# EAGLE board RC_Transmitter_TX_FINAL_v4.4 (EAGLE 9.7.0)
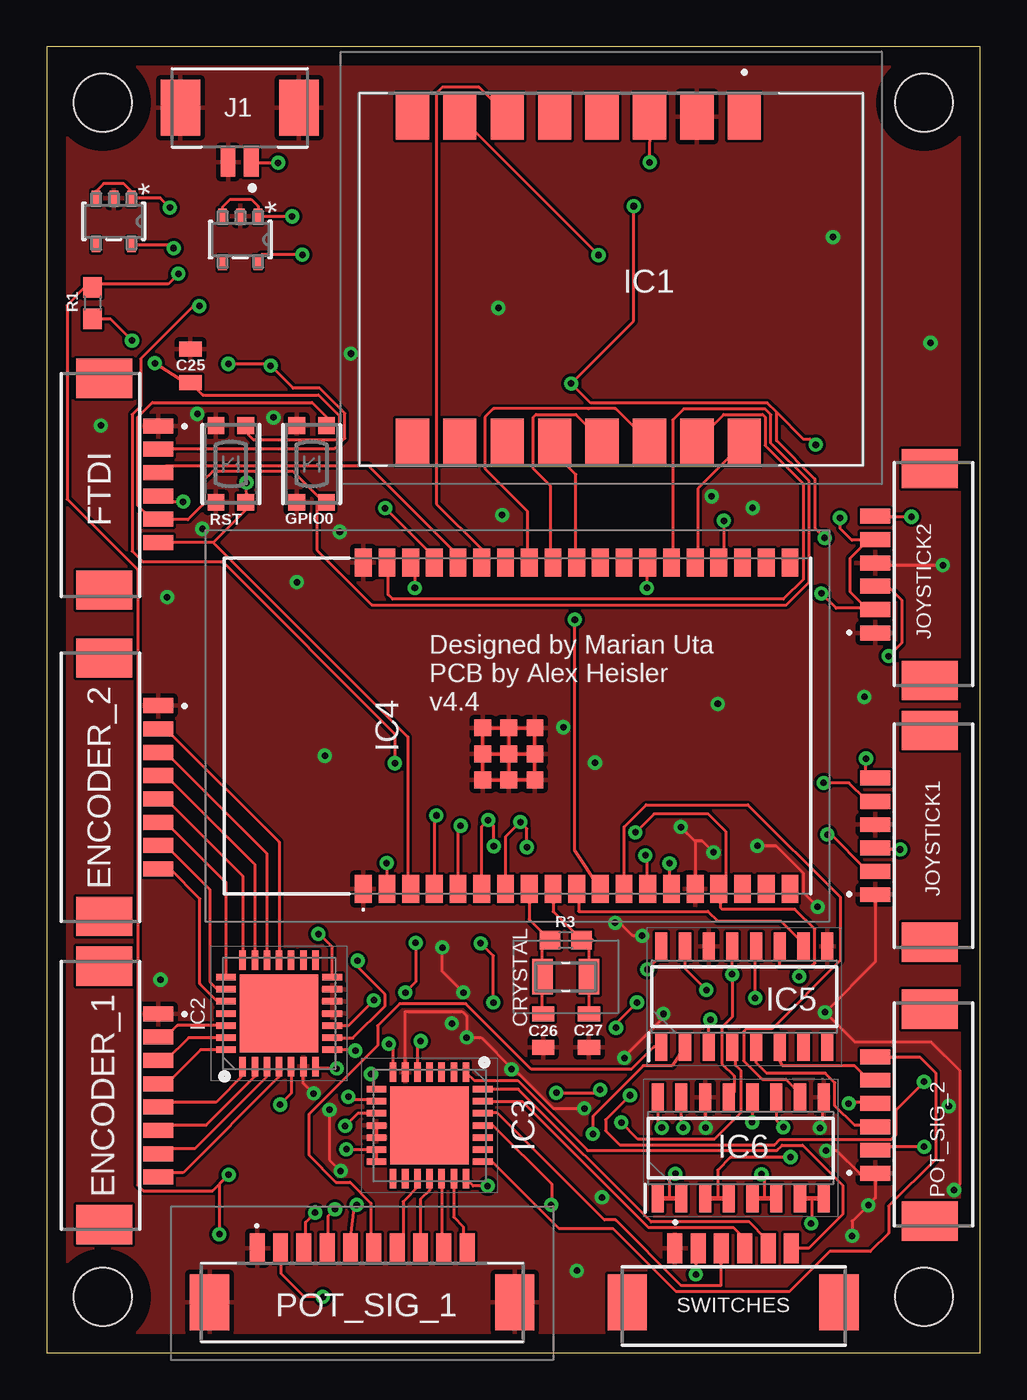
[diagram p0: board, top side]
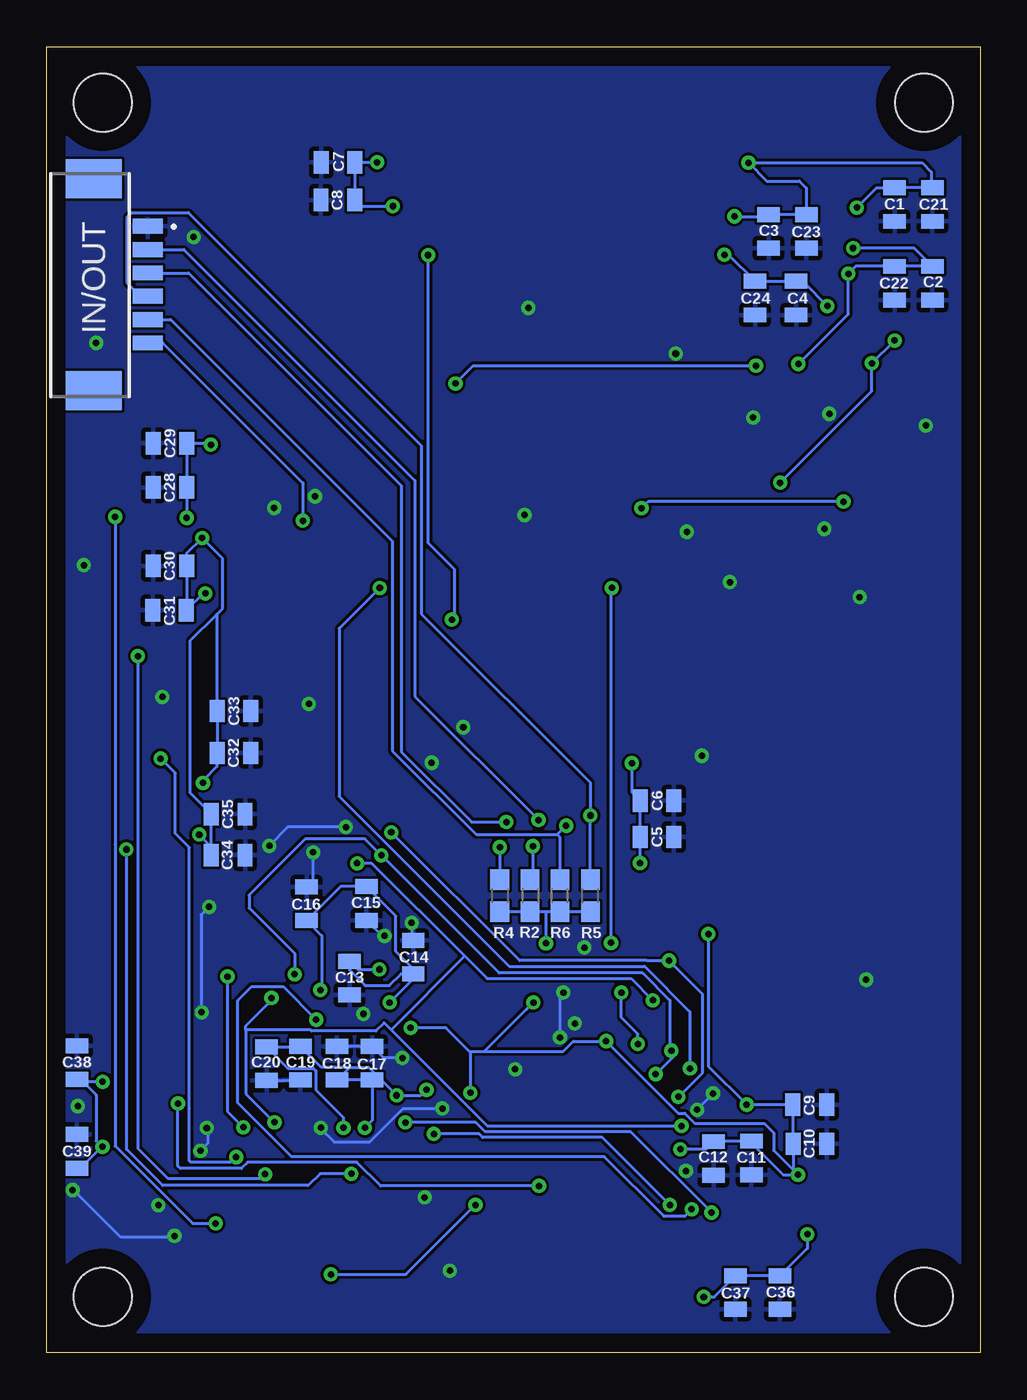
[diagram p1: board, bottom side, seen from below]

Size 50 x 70 mm. Coordinates in mm from the lower left corner, seen from the top.
Outline: 0,0 50,0 50,70 0,70 0,0
Copper layers (1*16): Top 0.035mm / dielectric 1.5mm / Bottom 0.035mm
Design rules "default": minimum track width 6mil, minimum drill 0.35mm, track to track 6mil, track to pad 6mil, pad to pad 6mil, via to via 6mil, smd to smd 6mil, copper to edge 40mil, drill to drill 6mil, minimum pad ring 10mil, minimum via ring 8mil, stop-mask expansion 4mil, vias tented up to drill 0mil, thermal gap 10mil
Holes 3.1 mm at 3,3 47,3 47,67 3,67

## Footprints (pad centres in the part's own frame; a part is rotated, then mirrored left to right if it is on the bottom)
0805 = smd 0.8 x 1.2: 1 -0.9,0; 2 0.9,0
ECX327CDX1293 = smd 1.1 x 1.9: 1 -1.25,0; 2 1.25,0
53261-0871 = smd 0.8 x 1.6: 1 -4.375,1.004; 2 -3.125,1.004; 3 -1.875,1.004; 4 -0.625,1.004; 5 0.625,1.004; 6 1.875,1.004; 7 3.125,1.004; 8 4.375,1.004 | smd 2.1 x 3: 9 6.925,-1.896; 10 -6.925,-1.896
0532610671 = smd 0.8 x 1.6: 1 -3.125,1.004; 2 -1.875,1.004; 3 -0.625,1.004; 4 0.625,1.004; 5 1.875,1.004; 6 3.125,1.004 | smd 2.1 x 3: 7 -5.675,-1.896; 8 5.675,-1.896
BTN_KMR2_4.6X2.8 = smd 0.9 x 0.9: A 2.05,0.8; A' -2.05,0.8; B 2.05,-0.8; B' -2.05,-0.8
LAMBDA80C24S = smd 2.5 x 1.78: 1 -8.725,7.135; 2 -8.725,4.595; 3 -8.725,2.055; 4 -8.725,-0.485; 5 -8.725,-3.025; 6 -8.725,-5.565; 7 -8.725,-8.105; 8 -8.725,-10.645; 9 8.725,-10.645; 10 8.725,-8.105; 11 8.725,-5.565; 12 8.725,-3.025; 13 8.725,-0.485; 14 8.725,2.055; 15 8.725,4.595; 16 8.725,7.135
QFN65P600X600X100-29N = smd 1.05 x 0.35: 1 -2.85,1.95; 2 -2.85,1.3; 3 -2.85,0.65; 4 -2.85,0; 5 -2.85,-0.65; 6 -2.85,-1.3; 7 -2.85,-1.95; 15 2.85,-1.95; 16 2.85,-1.3; 17 2.85,-0.65; 18 2.85,0; 19 2.85,0.65; 20 2.85,1.3; 21 2.85,1.95 | smd 0.35 x 1.05: 8 -1.95,-2.85; 9 -1.3,-2.85; 10 -0.65,-2.85; 11 0,-2.85; 12 0.65,-2.85; 13 1.3,-2.85; 14 1.95,-2.85; 22 1.95,2.85; 23 1.3,2.85; 24 0.65,2.85; 25 0,2.85; 26 -0.65,2.85; 27 -1.3,2.85; 28 -1.95,2.85 | smd 4.2 x 4.2: 29 0,0
ESP32WROVERIEN16R8 = smd 1.5 x 0.9: 1 -8.75,8.26; 2 -8.75,6.99; 3 -8.75,5.72; 4 -8.75,4.45; 5 -8.75,3.18; 6 -8.75,1.91; 7 -8.75,0.64; 8 -8.75,-0.63; 9 -8.75,-1.9; 10 -8.75,-3.17; 11 -8.75,-4.44; 12 -8.75,-5.71; 13 -8.75,-6.98; 14 -8.75,-8.25; 15 -8.75,-9.52; 16 -8.75,-10.79; 17 -8.75,-12.06; 18 -8.75,-13.33; 19 -8.75,-14.6; 20 8.75,-14.6; 21 8.75,-13.33; 22 8.75,-12.06; 23 8.75,-10.79; 24 8.75,-9.52; 25 8.75,-8.25; 26 8.75,-6.98; 27 8.75,-5.71; 28 8.75,-4.44; 29 8.75,-3.17; 30 8.75,-1.9; 31 8.75,-0.63; 32 8.75,0.64; 33 8.75,1.91; 34 8.75,3.18; 35 8.75,4.45; 36 8.75,5.72; 37 8.75,6.99; 38 8.75,8.26 | smd 0.9 x 0.9: 39 -1.5,0.46; 40 -1.5,1.86; 41 -2.9,1.86; 42 -2.9,0.46; 43 -2.9,-0.94; 44 -1.5,-0.94; 45 -0.1,-0.94; 46 -0.1,0.46; 47 -0.1,1.86
SOIC127P600X175-16N = smd 1.5 x 0.65: 1 -2.7,4.445; 2 -2.7,3.175; 3 -2.7,1.905; 4 -2.7,0.635; 5 -2.7,-0.635; 6 -2.7,-1.905; 7 -2.7,-3.175; 8 -2.7,-4.445; 9 2.7,-4.445; 10 2.7,-3.175; 11 2.7,-1.905; 12 2.7,-0.635; 13 2.7,0.635; 14 2.7,1.905; 15 2.7,3.175; 16 2.7,4.445
MOLEX_53261-0271_0 = smd 0.8 x 1.6: 1 -0.625,2.9; 2 0.625,2.9 | smd 2.1 x 3: 3 -3.175,0; 4 3.175,0
0532611071 = smd 0.8 x 1.6: 1 -5.625,2.9; 2 -4.375,2.9; 3 -3.125,2.9; 4 -1.875,2.9; 5 -0.625,2.9; 6 0.625,2.9; 7 1.875,2.9; 8 3.125,2.9; 9 4.375,2.9; 10 5.625,2.9 | smd 2.1 x 3: MP1 -8.175,0; MP2 8.175,0
0603 = smd 1.1 x 1: 1 -0.85,0; 2 0.85,0
SOT_RG1_DIO-L = smd 0.8 x 0.457: 1 -1.251,0.95; 2 -1.251,0; 3 -1.251,-0.95; 4 1.251,-0.95; 5 1.251,0.95

## Placement (x,y rotation side)
C1  10uF  [0805]  4.58,61.53 270 bottom
C2  10uF  [0805]  2.55,57.33 270 bottom
C3  10uF  [0805]  11.32,60.1 270 bottom
C4  10uF  [0805]  9.85,56.52 270 bottom
C5  10uF  [0805]  17.3,27.65 180 bottom
C6  0.1uF  [0805]  17.3,29.6 180 bottom
C7  10uF  [0805]  34.4,63.8 180 bottom
C8  0.1uF  [0805]  34.41,61.78 180 bottom
C9  10uF  [0805]  9.12,13.3 180 bottom
C10  0.1uF  [0805]  9.1,11.2 180 bottom
C11  10uF  [0805]  12.25,10.45 90 bottom
C12  0.1uF  [0805]  14.27,10.42 90 bottom
C13  0.1uF  [0805]  33.77,20.09 90 bottom
C14  10uF  [0805]  30.36,21.21 270 bottom
C15  0.1uF  [0805]  32.87,24.09 90 bottom
C16  10uF  [0805]  36.07,24.07 270 bottom
C17  0.1uF  [0805]  32.56,15.52 270 bottom
C18  10uF  [0805]  34.45,15.52 270 bottom
C19  0.1uF  [0805]  36.41,15.53 90 bottom
C20  10uF  [0805]  38.22,15.5 90 bottom
C21  0.1uF  [0805]  2.55,61.53 270 bottom
C22  0.1uF  [0805]  4.58,57.33 270 bottom
C23  0.1uF  [0805]  9.3,60.1 270 bottom
C24  0.1uF  [0805]  12.05,56.52 270 bottom
C25  1uF  [0805]  7.7,52.9 270 top
C26  6.2 pF  [0805]  26.6,17.27 90 top
C27  6.2 pF  [0805]  29.05,17.27 90 top
C28  0.1uF  [0805]  43.4,46.38 180 bottom
C29  10uF  [0805]  43.4,48.75 180 bottom
C30  0.1uF  [0805]  43.4,42.17 180 bottom
C31  10uF  [0805]  43.42,39.8 180 bottom
C32  0.1uF  [0805]  39.96,32.15 0 bottom
C33  10uF  [0805]  39.96,34.4 0 bottom
C34  0.1uF  [0805]  40.27,26.68 0 bottom
C35  10uF  [0805]  40.27,28.88 0 bottom
C36  10uF  [0805]  10.72,3.23 270 bottom
C37  0.1uF  [0805]  13.1,3.23 270 bottom
C38  10uF  [0805]  48.38,15.55 270 bottom
C39  0.1uF  [0805]  48.38,10.8 270 bottom
CRYSTAL  32.768 kHz  [ECX327CDX1293]  27.81,20.16 0 top
ENCODER_1  0532610871  [53261-0871]  4.98,13.8 270 top
ENCODER_2  0532610871  [53261-0871]  4.98,30.31 270 top
FTDI  0532610671  [0532610671]  4.98,46.55 270 top
GPIO0  KMR2  [BTN_KMR2_4.6X2.8]  14.2,47.63 90 top
IC1  LAMBDA80C-24S  [LAMBDA80C24S]  30.24,57.53 270 top
IC2  MCP23S17T-E_ML  [QFN65P600X600X100-29N]  12.45,18.19 90 top
IC3  MCP23S17T-E_ML  [QFN65P600X600X100-29N]  20.51,12.19 270 top
IC4  ESP32-WROVER-IE-N16R8  [ESP32WROVERIEN16R8]  25.22,33.6 90 top
IC5  MCP3208-CI_SL  [SOIC127P600X175-16N]  37.37,19.09 90 top
IC6  MCP3208-CI_SL  [SOIC127P600X175-16N]  37.18,10.98 90 top
IN/OUT  0532610671  [0532610671]  45.59,57.25 270 bottom
J1  MOLEX_53261-0271MOLEX_53261-0271_0_0  [MOLEX_53261-0271_0]  10.34,66.72 180 top
JOYSTICK1  0532610671  [0532610671]  45.4,27.68 90 top
JOYSTICK2  0532610671  [0532610671]  45.4,41.71 90 top
POT_SIG_1  0532611071  [0532611071]  16.9,2.71 0 top
POT_SIG_2  0532610671  [0532610671]  45.4,12.74 90 top
R1  10k  [0603]  2.45,56.25 270 top
R2  10k  [0603]  24.1,24.5 270 bottom
R3  10M  [0603]  27.81,22.12 180 top
R4  10k  [0603]  25.73,24.5 270 bottom
R5  10k  [0603]  20.88,24.5 90 bottom
R6  10k  [0603]  22.5,24.5 90 bottom
RST  KMR2  [BTN_KMR2_4.6X2.8]  9.87,47.63 90 top
SWITCHES  0532610671  [0532610671]  36.77,4.6 0 top
U1  AP2112K-3.3TRG1SOT_RG1_DIO-L  [SOT_RG1_DIO-L]  10.38,59.66 270 top
U2  AP2112K-3.3TRG1SOT_RG1_DIO-L  [SOT_RG1_DIO-L]  3.6,60.63 270 top

## Library data of the parts
C1-C39 = SparkFun-Capacitors; PROD_ID: CAP-11330
CRYSTAL = ECX-.327-CDX-1293; ARROW_PART_NUMBER: Crystal; ARROW_PRICE-STOCK: https://www.arrow.com/en/products/ecx-.327-cdx-1293/ecs-international?region=nac; DESCRIPTION: Crystals 32.786kHz 12.5pF 5ppm -40C +85C; HEIGHT: 0.9mm; MANUFACTURER_NAME: ECS; MANUFACTURER_PART_NUMBER: ECX-.327-CDX-1293; MOUSER_PART_NUMBER: 520-ECX-.327CDX-1293; MOUSER_PRICE-STOCK: https://www.mouser.co.uk/ProductDetail/ECS/ECX-.327-CDX-1293?qs=Mv7BduZupUhhIpiFqP8JVA%3D%3D
ENCODER_1 ENCODER_2 = 0532610871; ARROW_PART_NUMBER: 0532610871; ARROW_PRICE-STOCK: https://www.arrow.com/en/products/0532610871/molex?region=europe; DESCRIPTION: CONN HEADER 8POS 1.25MM R/A SMD; HEIGHT: mm; MANUFACTURER_NAME: Molex; MANUFACTURER_PART_NUMBER: 0532610871; MOUSER_PART_NUMBER: N/A; MOUSER_PRICE-STOCK: https://www.mouser.co.uk/ProductDetail/Molex/0532610871?qs=PBcRNPEHKspgmg1Yw%252BK1hQ%3D%3D
FTDI IN/OUT JOYSTICK1 JOYSTICK2 POT_SIG_2 SWITCHES = 0532610671; ARROW_PART_NUMBER: 0532610671; ARROW_PRICE-STOCK: https://www.arrow.com/en/products/0532610671/molex?region=europe; DESCRIPTION: 1.25mm Pitch PicoBlade Header, Surface Mount, Right Angle, 6 Circuits; HEIGHT: mm; MANUFACTURER_NAME: Molex; MANUFACTURER_PART_NUMBER: 0532610671; MOUSER_PART_NUMBER: N/A; MOUSER_PRICE-STOCK: https://www.mouser.co.uk/ProductDetail/Molex/0532610671?qs=PBcRNPEHKspfA5Wux0sJoA%3D%3D
GPIO0 RST = microbuilder
IC1 = LAMBDA80C-24S; ARROW_PART_NUMBER: LAMBDA80C-24S; ARROW_PRICE-STOCK: https://www.arrow.com/en/products/lambda80c-24s/rf-solutions; DESCRIPTION: RF Transceiver FSK 3.3V 16-Pin SMD Module; HEIGHT: 2mm; MANUFACTURER_NAME: RF SOLUTIONS; MANUFACTURER_PART_NUMBER: LAMBDA80C-24S; MOUSER_PART_NUMBER: 223-LAMBDA80C-24S; MOUSER_PRICE-STOCK: https://www.mouser.co.uk/ProductDetail/RF-Solutions/LAMBDA80C-24S?qs=17u8i%2FzlE89dhjIrlJ9FHg%3D%3D
IC2 IC3 = MCP23S17T-E_ML; ARROW_PART_NUMBER: MCP23S17T-E/ML; ARROW_PRICE-STOCK: https://www.arrow.com/en/products/mcp23s17t-eml/microchip-technology?region=nac; DESCRIPTION: Interface - I/O Expanders 16bit Input/Output Exp SPI interface; HEIGHT: 1mm; MANUFACTURER_NAME: Microchip; MANUFACTURER_PART_NUMBER: MCP23S17T-E/ML; MOUSER_PART_NUMBER: 579-MCP23S17T-E/ML; MOUSER_PRICE-STOCK: https://www.mouser.co.uk/ProductDetail/Microchip-Technology-Atmel/MCP23S17T-E-ML?qs=usxtMOJb1RyrYiIch4BqxQ%3D%3D
IC4 = ESP32-Wrover-IE-N16R8; DESCRIPTION: RX TXRX MOD WIFI EXT IPEX SMD; HEIGHT: 3.45mm; MANUFACTURER_NAME: Espressif Systems; MANUFACTURER_PART_NUMBER: ESP32-Wrover-IE-N16R8; MOUSER_PART_NUMBER: 356-ESP32WRVIE2864UC; MOUSER_PRICE-STOCK: https://www.mouser.co.uk/ProductDetail/Espressif-Systems/ESP32-WROVER-IE-N16R8?qs=Li%252BoUPsLEnvfUqsrs3zskw%3D%3D
IC5 IC6 = MCP3208-CI_SL; ARROW_PART_NUMBER: MCP3208-CI/SL; ARROW_PRICE-STOCK: https://www.arrow.com/en/products/mcp3208-cisl/microchip-technology?region=nac; DESCRIPTION: 12bit A-Dconverter,MCP3208-CI/SL TSSOP16; HEIGHT: 1.75mm; MANUFACTURER_NAME: Microchip; MANUFACTURER_PART_NUMBER: MCP3208-CI/SL; MOUSER_PART_NUMBER: 579-MCP3208CISL; MOUSER_PRICE-STOCK: https://www.mouser.co.uk/ProductDetail/Microchip-Technology-Atmel/MCP3208-CI-SL?qs=BYQkrObauitTKFi1HLZPqw%3D%3D
J1 = Molex - 53261-0271; CENTROID_NOT_SPECIFIED: No; DATASHEET: http://www.molex.com/pdm_docs/sd/532610271_sd.pdf; DIGIKEY_DESCRIPTION: CONN HEADER 2POS 1.25MM R/A SMD; DIGIKEY_PART_NUMBER: WM7620CT-ND; LEAD_FREE: yes; MF: Molex; MOUSER_PART_NUMBER: 538-53261-0271; MPN: 53261-0271; PACKAGE: HDR02; PREFIX: J; ROHS: yes; TEMPERATURE_RANGE_HIGH: +85°C; TEMPERATURE_RANGE_LOW: -40°C
POT_SIG_1 = 0532611071; ARROW_PART_NUMBER: 0532611071; ARROW_PRICE-STOCK: https://www.arrow.com/en/products/0532611071/molex?region=europe; DESCRIPTION: Headers & Wire Housings 1.25MM HDR 10P RA SMT; HEIGHT: 3.4mm; MANUFACTURER_NAME: Molex; MANUFACTURER_PART_NUMBER: 0532611071; MOUSER_PART_NUMBER: N/A; MOUSER_PRICE-STOCK: https://www.mouser.co.uk/ProductDetail/Molex/0532611071?qs=PBcRNPEHKsrWtdQS0ObonQ%3D%3D
R1-R6 = SparkFun-Resistors; PROD_ID: RES-08609
U1 U2 = 2023-03-07_19-05-44_Library; COPYRIGHT: Copyright (C) 2023 Ultra Librarian. All rights reserved.; MANUFACTURER_PART_NUMBER: AP2112K-3.3TRG1; MFR_NAME: Diodes Inc

## Nets
3.3V: C2.1 C7.1 C8.1 C9.2 C10.2 C11.2 C12.2 C13.2 C14.2 C15.2 C16.2 C17.2 C18.2 C19.2 C20.2 C22.1 C28.1 C29.1 C30.1 C31.1 C32.1 C33.1 C34.1 C35.1 C36.1 C37.1 C38.2 C39.2 FTDI.2 IC1.3 IC2.5 IC2.14 IC3.5 IC3.13 IC3.14 IC5.15 IC5.16 IC6.15 IC6.16 JOYSTICK1.2 JOYSTICK1.5 JOYSTICK2.2 JOYSTICK2.5 POT_SIG_1.2 POT_SIG_2.2 R1.1 R2.2 R4.2 R5.1 R6.1 U2.5
3.3V*: C4.1 C5.2 C6.2 C24.1 IC4.2 U1.5
ANO1_ENCA: ENCODER_1.8 IC2.4
ANO1_ENCB: ENCODER_1.7 IC2.3
ANO1_SW1: ENCODER_1.6 IC2.2
ANO1_SW2: ENCODER_1.5 IC2.1
ANO1_SW3: ENCODER_1.4 IC2.28
ANO1_SW4: ENCODER_1.3 IC2.27
ANO1_SW5: ENCODER_1.2 IC2.26
ANO2_ENCA: ENCODER_2.8 IC2.24
ANO2_ENCB: ENCODER_2.7 IC2.23
ANO2_SW1: ENCODER_2.6 IC2.22
ANO2_SW2: ENCODER_2.5 IC2.21
ANO2_SW3: ENCODER_2.4 IC2.20
ANO2_SW4: ENCODER_2.3 IC2.19
ANO2_SW5: ENCODER_2.2 IC2.18
GND: C1.2 C2.2 C3.2 C4.2 C5.1 C6.1 C7.2 C8.2 C9.1 C10.1 C11.1 C12.1 C13.1 C14.1 C15.1 C16.1 C17.1 C18.1 C19.1 C20.1 C21.2 C22.2 C23.2 C24.2 C25.1 C26.1 C27.1 C28.2 C29.2 C30.2 C31.2 C32.2 C33.2 C34.2 C35.2 C36.2 C37.2 C38.1 C39.1 ENCODER_1.1 ENCODER_2.1 FTDI.1 GPIO0.A GPIO0.A' IC1.2 IC2.6 IC2.11 IC2.12 IC2.13 IC3.6 IC3.11 IC3.12 IC4.1 IC4.15 IC4.38 IC4.39 IC4.40 IC4.41 IC4.42 IC4.43 IC4.44 IC4.45 IC4.46 IC4.47 IC5.9 IC5.14 IC6.9 IC6.14 IN/OUT.1 J1.2 J1.3 J1.4 JOYSTICK1.1 JOYSTICK1.4 JOYSTICK2.1 JOYSTICK2.4 POT_SIG_1.1 POT_SIG_1.MP1 POT_SIG_1.MP2 POT_SIG_2.1 RST.A RST.A' SWITCHES.1 U1.2 U2.2
GPIO0: FTDI.5 GPIO0.B GPIO0.B' IC4.25
GPIO2*: IC1.16 IC4.24
GPIO4*: IC2.7 IC4.26
GPIO5*: IC1.12 IC4.29
GPIO12(HMISO): IC2.10 IC3.10 IC4.14 IC5.12 IC6.12
GPIO13(HMOSI): IC2.9 IC3.9 IC4.16 IC5.11 IC6.11
GPIO14(HSCLK): IC2.8 IC3.8 IC4.13 IC5.13 IC6.13
GPIO15: IC4.23 IN/OUT.6
GPIO18(SCLK): IC1.13 IC4.30
GPIO19(MISO): IC1.14 IC4.31
GPIO21*: IC1.6 IC4.33
GPIO22*: IC3.7 IC4.36
GPIO23(MOSI): IC1.15 IC4.37
GPIO25*: IC4.10 IC5.10
GPIO26*: IC1.7 IC4.11
GPIO27*: IC4.12 IC6.10
GPIO32*: C26.2 CRYSTAL.1 IC4.8 R3.2
GPIO33*: C27.2 CRYSTAL.2 IC4.9 R3.1
GPIO34: IC4.6 IN/OUT.2 R2.1
GPIO35: IC4.7 IN/OUT.3 R4.1
GPIO36: IC4.4 IN/OUT.4 R5.2
GPIO39: IC4.5 IN/OUT.5 R6.2
JOYSTICK_X1: IC6.1 IC6.2 JOYSTICK1.3
JOYSTICK_X2: IC6.5 IC6.6 JOYSTICK2.3
JOYSTICK_Y1: IC6.3 IC6.4 JOYSTICK1.6
JOYSTICK_Y2: IC6.7 IC6.8 JOYSTICK2.6
N$9: IC5.7
N$10: IC5.8
POT1: IC5.1 POT_SIG_1.6
POT1_SW: IC3.17 POT_SIG_1.7
POT2: IC5.2 POT_SIG_1.5
POT2_SW: IC3.18 POT_SIG_1.8
POT3: IC5.3 POT_SIG_1.4
POT3_SW: IC3.19 POT_SIG_1.9
POT4: IC5.4 POT_SIG_1.3
POT4_SW: IC3.20 POT_SIG_1.10
POT5: IC5.5 POT_SIG_2.3
POT5_SW: IC3.21 POT_SIG_2.4
POT6: IC5.6 POT_SIG_2.5
POT6_SW: IC3.22 POT_SIG_2.6
RST: C25.2 FTDI.6 IC4.3 R1.2 RST.B RST.B'
RXD: FTDI.3 IC4.34
SW1: IC3.25 SWITCHES.2
SW2: IC3.26 SWITCHES.3
SW3: IC3.27 SWITCHES.4
SW4: IC3.28 SWITCHES.5
SW5: IC3.1 SWITCHES.6
TXD: FTDI.4 IC4.35
VIN: C1.1 C3.1 C21.1 C23.1 J1.1 U1.1 U1.3 U2.1 U2.3

## Tracks (layer width: path | path; a pad name or v marks a point on that pad's centre or on a via)
3.3V  (via drill 0.35)
  Top 0.152: v12.5,13.31 13.1,13.91 IC2.5 | IC3.5 19.86,16.53 v20.03,16.7 | IC6.15 33.98,13.72 33.83,13.72 IC6.15 | JOYSTICK1.2 44.35,25.91 43.89,25.91 42.02,27.77 v41.83,27.77 | JOYSTICK1.5 44.35,29.41 43.89,29.41 JOYSTICK1.5 | 43.89,39.93 44.35,39.93 JOYSTICK2.2 43.89,39.93 | 43.87,39.95 43.03,40.79 43.03,42.57 43.89,43.43 | 43.87,39.95 43.89,39.93 | 43.89,43.43 44.35,43.43 JOYSTICK2.5 | 43.87,39.95 43.83,39.91 42.29,39.91 v41.5,40.7 | FTDI.2 6.1,48.46 15.43,48.46 15.98,49.01 15.98,50.36 14.63,51.7 13.2,51.7 v12,52.9 11.9,53 v9.73,53 | 43.89,43.43 JOYSTICK2.5 | IC1.3 32.3,64.91 32.3,64.9 v32.3,63.8 | IC3.14 IC3.13 16.08,10.89 v16.06,10.92 | IC2.14 15.3,21.75 14.6,22.45 v14.55,22.45 | JOYSTICK2.5 44.36,43.55 43.13,43.55 42.5,44.18 v42.5,44.75 | 39.1,50.4 39.1,48.88 41.15,46.83 41.15,44.2 v41.67,43.67 | 39.1,50.4 38.6,50.9 29.15,50.9 v28.1,51.95 31.45,55.3 v31.45,61.45 | IC5.16 32.92,21.3 v32.17,20.55 | v29.65,14.1 29.49,13.94 v27.3,13.94 | v31.25,13.8 29.95,12.5 29.95,11.9 30.7,11.15 39,11.15 39.28,11.44 45.24,11.44 45.5,11.7 45.5,13.03 v47,14.53 | IC6.15 34.01,12.71 34,12.7 34,12.16 v34.1,12.06 | IC5.15 34.2,20.61 35.34,19.46 v35.34,19.45 | IC6.16 32.73,12.28 v32.95,12.06 | U2.5 6.64,59.38 6.72,59.3 6.72,59.27 v6.8,59.2 | v31.62,18.77 30.5,17.65 v30.5,17.42 | 39.1,50.4 40.53,48.98 40.89,48.98 v41.2,48.67 | JOYSTICK1.5 44.3,29.66 43.87,29.66 42.98,30.55 v41.62,30.55 | v9.25,6.36 9.25,9.05 v9.75,9.55 8.89,8.69 5.18,8.69 4.88,8.99 4.88,41.97 1.09,45.75 1.09,56.14 2.05,57.1 R1.1 2.62,57.27 6.51,57.27 v7.06,57.83 | POT_SIG_2.2 44.58,11.05 v47.01,11.05 | POT_SIG_1.2 12.57,5.56 12.57,4.24 13.81,3 v14.8,3
  Top 0.152: v23.93,18.77 23.93,21.27 v23.25,21.95
  Bottom 0.152: 27.35,16.15 26.55,16.15 | 26.55,16.15 22.33,16.15 21.78,16.7 v20.03,16.7 16.17,12.84 15.81,12.84 15.27,12.29 11.54,12.29 11.05,11.8 11.05,10.85 v9.75,9.55 | v32.3,63.8 C7.1 C8.1 33.17,61.45 v31.45,61.45 | v9.75,9.55 10,9.8 C10.2 10.02,11.22 C9.2 v12.5,13.31 14.55,15.35 v14.55,22.45 | v9.75,9.55 10.55,9.55 12.25,11.25 C11.2 14.24,11.35 C12.2 14.67,10.92 v16.06,10.92 | v12,52.9 27.15,52.9 v28.1,51.95 | C14.2 31.01,20.31 31.64,19.68 32.94,19.68 33.77,20.51 C13.2 33.34,20.55 v32.17,20.55 | v31.62,18.77 30.36,20.04 C14.2 | C14.2 30.36,20.59 31.3,21.52 31.3,23.41 C15.2 34.25,24.98 C16.2 35.26,22.36 35.26,19.54 35.34,19.46 v35.34,19.45 | 27.35,16.15 27.3,16.1 v27.3,13.94 | v29.65,14.1 29.95,13.8 v31.25,13.8 32.75,15.3 33.77,15.3 | 33.77,15.3 C18.2 C17.2 32.56,12.45 v32.95,12.06 | 33.77,15.3 35.28,15.3 C19.2 36.45,16.43 36.48,16.4 C20.2 37.08,15.26 35.72,15.26 35.58,15.12 35.58,14.1 34.1,12.62 v34.1,12.06 | v6.8,59.2 3.52,59.2 C2.1 C22.1 6.66,58.23 v7.06,57.83 7.06,55.67 v9.73,53 | 27.35,16.15 28.61,17.42 v30.5,17.42 | v42.5,44.75 C28.1 C29.1 41.28,48.75 v41.2,48.67 | v41.5,40.7 41.62,40.7 C31.1 42.5,39.82 C30.1 42.5,42.85 v41.67,43.67 40.58,42.58 40.58,39.9 40.9,39.58 | v41.62,30.55 41.62,30.68 40.88,31.42 40.88,32.12 C32.1 C33.1 40.9,34.44 40.9,39.58 | v41.83,27.77 41.23,27.18 41.23,26.68 C34.1 C35.1 42.3,30 42.3,38.17 40.9,39.58 | v14.8,3 14.22,3 C37.1 C36.1 9.25,5.6 v9.25,6.36 | v47,14.53 48.26,14.53 C38.2 48.19,14.65 47.35,13.82 47.35,11.36 47.05,11.05 | 47.05,11.05 v47.01,11.05 | C39.2 48.2,9.9 47.05,11.05 | R4.2 R2.2 23.25,23.65 | 23.25,23.65 R6.1 R5.1
  Bottom 0.152: v23.25,21.95 23.25,22.02 23.25,23.65 | v23.93,18.77 24.27,18.43 26.55,16.15
3.3V*  (via drill 0.35)
  Top 0.152: IC4.2 18.24,26.22 v18.21,26.24 | v18.65,31.6 18.65,33.17 9.42,42.4 5.14,42.4 4.57,42.96 4.57,50.29 5.03,50.75 5.03,53.28 7.85,56.1 v8.18,56.1 | U1.5 11.46,58.54 11.46,58.81 11.5,58.85 v13.7,58.85
  Bottom 0.152: v18.21,26.24 18.21,27.64 C5.2 C6.2 18.65,30.05 v18.65,31.6 | v13.7,58.85 13.48,58.85 C24.1 C4.1 9.78,57.35 9.43,57.35 v8.18,56.1
ANO1_ENCA
  Top 0.152: ENCODER_1.8 6.21,9.65 7.31,9.65 12.44,14.78 IC2.4
ANO1_ENCB
  Top 0.152: IC2.3 11.79,15.32 11.79,14.78 7.97,10.97 6.21,10.97 ENCODER_1.7
ANO1_SW1
  Top 0.152: IC2.2 11.18,15.31 11.18,14.84 8.53,12.19 6.24,12.19 ENCODER_1.6
ANO1_SW2
  Top 0.152: IC2.1 10.5,14.86 9.08,13.43 6.33,13.43 ENCODER_1.5
ANO1_SW3
  Top 0.152: IC2.28 8.25,16.24 6.43,14.43 ENCODER_1.4
ANO1_SW4
  Top 0.152: IC2.27 7.6,16.89 6.38,15.68 ENCODER_1.3
ANO1_SW5
  Top 0.152: IC2.26 7,17.54 6.38,16.93 ENCODER_1.2
ANO2_ENCA
  Top 0.152: ENCODER_2.8 6.61,25.93 8.21,24.34 8.21,19.77 9.14,18.84 IC2.24
ANO2_ENCB
  Top 0.152: ENCODER_2.7 6.38,27.18 8.75,24.82 8.75,19.89 9.14,19.49 IC2.23
ANO2_SW1
  Top 0.152: ENCODER_2.6 6.38,28.43 9.6,25.22 IC2.22
ANO2_SW2
  Top 0.152: ENCODER_2.5 6.38,29.68 10.5,25.57 IC2.21
ANO2_SW3
  Top 0.152: ENCODER_2.4 6.38,30.93 11.15,26.17 IC2.20
ANO2_SW4
  Top 0.152: IC2.19 11.79,21.07 11.79,26.77 6.4,32.16 6.1,32.16 ENCODER_2.3
ANO2_SW5
  Top 0.152: ENCODER_2.2 6.38,33.44 12.45,27.37 IC2.18
GND  (via drill 0.35)
  Top 0.152: v48.01,42.22 44.5,42.22 JOYSTICK2.4 | IC3.6 19.21,15.59 19.21,15.6 19.21,18.29 22.26,18.29 22.5,18.05 v22.5,16.9 23.27,16.9 24.98,15.2 | IC4.40 IC4.39 | IC4.46 IC4.45 | IC4.45 | IC4.44 IC4.45 | IC4.44 IC4.43 IC4.42 | IC4.42 IC4.41 IC4.40 | IC4.47 23.4,33.5 | 23.4,33.5 IC4.46 | IC4.46 IC4.39 | IC4.40 23.36,33.46 23.4,33.5 | IC4.39 IC4.44 | IC4.39 IC4.42 | IC3.11 IC3.12 | v24.9,15.2 24.98,15.2 | 24.98,15.2 25.05,15.2 27.15,13.1 v28.8,13.1 | IC2.6 13.75,14.45 v14.3,13.9 | v15.75,9.75 15.15,10.35 v15.15,13.03 | v24.9,15.2 | v41.3,23.9 40.55,24.65 40.55,25.7 39.08,27.17 v38.07,27.17 | JOYSTICK1.1 44.4,20.95 v41.7,18.25 43.28,16.67 47.37,16.67 48.91,15.13 48.91,9.02 v48.61,8.72 | POT_SIG_2.1 44.4,9.58 | 44.4,9.58 44.4,8.31 v44.01,7.92 | IC4.15 34.74,27.4 33.98,28.17 v33.98,28.18 34.73,27.43 35.12,27.43 v35.73,26.82 | 44.4,9.58 43.58,9.58 42.33,10.83 v41.76,10.83 | IC6.9 41.55,13.61 41.55,12.18 v41.42,12.05 | IC6.14 35.27,12.09 v35.31,12.06 | v30.45,23.05 30.7,23.05 31.4,22.35 v31.91,22.35 | v33.03,18.17 33.03,17.94 30.95,15.86 v30.95,15.8 | v44.02,7.91 v44.01,7.92 | v44.01,7.92 43.15,7.06 v43.15,6.27 | v22.32,19.31 21.2,20.44 v21.2,21.73
  Bottom 0.152: v22.5,16.9 22.5,18.98 22.32,19.15 v22.32,19.31 | v28.8,13.1 30.17,13.1 30.91,13.1 32.7,11.3 34.6,11.3 35.31,12.01 v35.31,12.06 | C20.1 36.44,14.6 C19.1 | C18.1 C17.1 31.95,15.8 v30.95,15.8 | v33.98,28.18 37.07,28.18 v38.07,27.17 | v41.3,23.9 41.72,23.48 41.72,18.27 v41.7,18.25 | C16.1 35.75,25.29 35.75,26.8 v35.73,26.82 | v41.42,12.05 41.36,11.98 41.36,11.23 v41.76,10.83 | v30.45,23.05 30.45,22.2 C14.1 | v15.15,13.03 15.13,13.05 15.13,13.07 v14.3,13.9 | C15.1 32.03,22.35 v31.91,22.35 | v48.61,8.72 48.55,8.72 46.02,6.2 43.22,6.2 v43.15,6.27
  other vias: 24.2,56 12.15,50.12 2.9,49.7 24.4,44.9 15.7,44 13.4,41.3 6.1,20 29.75,8.32 28.4,4.4 14.9,32 6.45,40.5 8.34,44.16 16.3,53.55 29.38,31.62 35.95,34.77 43.8,35.15 48.33,13.22 21.7,17.65 8.07,50.32 37.82,45.28 27.68,33.52 35.62,45.9 47.35,54.12 42.12,59.8
  pour Top: 0,0 50,0 50,70 0,70
  pour Bottom: 0,0 50,0 50,70 0,70
GPIO0
  Top 0.152: IC4.25 33.53,42.37 33.53,49.99 34.13,50.59 38.49,50.59 38.8,50.28 38.8,48.75 40.84,46.71 40.84,41.3 39.62,40.08 17.43,40.08 14.48,43.03 14.48,45.5 GPIO0.B' 14.85,45.59 13.2,47.24 8.89,47.24 8.38,46.72 8.38,45.46 7.57,44.65 6.1,44.65 FTDI.5 5.94,44.81 5.49,44.81 4.88,45.41 4.88,50.14 5.67,50.93 14.22,50.93 14.99,50.16 GPIO0.B
GPIO2*
  Top 0.152: IC1.16 34.88,46.31 34.88,42.49 IC4.24
GPIO4*  (via drill 0.35)
  Top 0.152: v32.16,41 32.16,42.22 IC4.26 | v15.54,15.24 14.5,15.24 IC2.7
  Bottom 0.152: v15.54,15.24 15.54,18.28 17.97,20.72 25.22,20.72 34.33,29.83 34.33,38.82 v32.16,41
GPIO5*
  Top 0.152: IC1.12 27.21,48.21 28.35,47.08 28.35,42.37 IC4.29
GPIO12(HMISO)  (via drill 0.35)
  Top 0.152: IC2.10 15.31,17.53 16.16,17.53 v17.53,18.9 | v33.36,26.24 33.38,26.23 33.38,24.99 IC4.14 | IC5.12 37.95,21.64 37.95,19.83 37.96,19.82 v37.96,19.02 | IC3.10 16.67,12.84 v15.99,12.16 | IC6.12 37.8,13.66 v37.8,12.36
  Bottom 0.152: v33.36,26.24 32.59,26.24 27.61,21.26 | 31.55,17.32 31.92,17.69 32.37,17.25 35.81,17.25 35.86,17.3 39.32,17.3 | 31.55,17.32 26.39,12.16 v15.99,12.16 | 27.61,21.26 26.41,20.06 18.68,20.06 v17.53,18.9 | 39.32,17.3 39.32,17.53 37.96,18.89 v37.96,19.02 | 31.55,17.32 27.61,21.26 | 39.32,17.3 39.32,13.88 v37.8,12.36
GPIO13(HMOSI)  (via drill 0.35)
  Top 0.152: v16.16,13.72 16.32,13.56 17.53,13.56 IC3.9 | v16.66,21.02 16.66,20.68 18.14,19.2 18.14,18.59 16.41,16.87 15.32,16.87 IC2.9 | IC6.11 39.09,12.47 v39.46,12.09 | IC5.11 39.26,21.77 39.26,20.73 40.31,20.73 | 40.31,20.73 41,20.73 41.15,20.88 41.15,22.71 40.08,23.77 36.19,23.77 36.12,23.84 36.12,24.84 IC4.16 36.37,25.21 36.37,27.95 35.43,28.88 32.54,28.88 31.55,27.89 v31.54,27.89 | 40.31,20.73 v40.31,20.17
  Bottom 0.152: v16.16,13.72 v16.15,13.72 14.86,15.02 14.86,19.21 v16.66,21.02 17.84,21.02 17.85,21.02 24.67,21.02 v31.54,27.89 | v40.31,20.17 40.31,12.94 v39.46,12.09
GPIO14(HSCLK)  (via drill 0.35)
  Top 0.152: IC6.13 36.82,13.96 36.82,14.84 36.17,15.5 36.17,17.45 36.72,18 v36.72,20.28 v36.72,20.29 36.72,21.42 IC5.13 | v17.37,14.94 17.53,14.78 17.53,14.17 IC3.8 | v32.07,26.66 32.16,26.58 32.16,24.99 IC4.13 | v16.53,16.2 16.49,16.24 IC2.8
  Bottom 0.152: v17.37,14.94 16.43,15.88 16.43,16.1 v16.53,16.2 16.61,16.27 16.61,18.89 18.08,20.36 25.77,20.36 31.92,26.51 v32.07,26.66 32.96,27.55 36.15,27.55 39.15,24.54 39.15,23.84 36.72,21.41 v36.72,20.28
GPIO15  (via drill 0.35)
  Top 0.152: IC4.23 36.28,42.62 36.28,44.59 v36.27,44.6
  Bottom 0.152: v36.27,44.6 36.27,46.62 43.77,54.12 IN/OUT.6
GPIO18(SCLK)
  Top 0.152: IC4.30 26.98,42.37 26.98,46.48 26.06,47.4 26.06,50.14 26.21,50.29 28.35,50.29 29.72,48.92 IC1.13
GPIO19(MISO)
  Top 0.152: IC4.31 25.76,42.37 25.76,45.11 23.47,47.4 23.47,50.14 23.93,50.6 29.02,50.6 29.02,50.59 30.48,50.59 32.27,48.8 IC1.14
GPIO21*
  Top 0.152: IC4.33 23.32,43.06 20.88,45.5 20.88,67.51 21.18,67.82 23.16,67.82 24.69,66.29 IC1.6
GPIO22*  (via drill 0.35)
  Top 0.152: IC3.7 18.56,16.34 18.35,16.55 v18.33,16.55 | v19.72,41 19.72,41.85 19.36,42.22 IC4.36 | v19.77,21.98 19.77,19.87 v19.21,19.31
  Bottom 0.152: v19.72,41 19.77,40.95 v19.77,21.98 | v19.21,19.31 19.21,17.98 18.33,17.09 v18.33,16.55
GPIO23(MOSI)
  Top 0.152: IC4.37 18.29,42.22 18.29,40.63 18.54,40.39 39.47,40.39 40.54,41.45 40.54,46.58 38.49,48.62 38.49,50.15 38.36,50.28 36.26,50.28 34.9,48.92 IC1.15
GPIO25*
  Top 0.152: IC4.10 28.5,24.84 28.5,23.66 35.43,23.66 35.94,23.14 39.32,23.14 40.55,21.92 IC5.10
GPIO26*  (via drill 0.35)
  Top 0.152: v28.29,39.3 28.29,26.93 IC4.11 | v29.57,58.83 22.25,66.14 IC1.7
  Bottom 0.152: v29.57,58.83 29.57,43.4 28.15,41.98 28.15,39.44 v28.29,39.3
GPIO27*
  Top 0.152: IC6.10 40.23,13.72 40.23,14.02 39.6,14.66 38.34,14.66 37.34,15.66 37.34,17.22 37.49,17.37 38.86,17.37 42.52,21.03 42.52,24.42 37.57,29.37 32.12,29.37 30.93,28.19 IC4.12
GPIO32*
  Top 0.152: IC4.8 25.85,23.23 R3.2 26.56,21.72 CRYSTAL.1 26.56,18.21 C26.2
GPIO33*
  Top 0.152: 27.13,24.54 IC4.9 27.13,24.54 | 27.13,24.54 27.13,23.65 R3.1 29.27,22.12 29.06,21.91 CRYSTAL.2 29.06,18.18 C27.2
GPIO34  (via drill 0.35)
  Top 0.152: IC4.6 23.31,28.21 v23.65,28.55 23.95,28.25 v23.95,27.15
  Bottom 0.152: IN/OUT.2 42.65,59.12 30.28,46.75 30.28,35.18 v23.65,28.55 | v23.95,27.15 23.95,25.5 R2.1
GPIO35  (via drill 0.35)
  Top 0.152: IC4.7 24.58,27.66 v25.38,28.45 25.73,28.1 v25.73,27.1
  Bottom 0.152: IN/OUT.3 42.39,57.88 30.99,46.48 30.99,32.21 27.23,28.45 v25.38,28.45 | v25.73,27.1 R4.1
GPIO36  (via drill 0.35)
  Top 0.152: v20.88,28.8 20.77,28.7 IC4.4
  Bottom 0.152: IN/OUT.4 44.98,56.62 45.69,57.33 45.69,60.87 45.45,61.1 42.41,61.1 29.92,48.61 29.92,39.6 20.88,30.55 v20.88,28.8 R5.2
GPIO39  (via drill 0.35)
  Top 0.152: v22.18,28.25 22.04,28.11 IC4.5
  Bottom 0.152: IN/OUT.5 43.36,55.38 31.48,43.49 31.48,32.26 26.98,27.77 22.66,27.77 | 22.66,27.77 v22.18,28.25 | R6.2 22.5,27.61 22.66,27.77
JOYSTICK_X1  (via drill 0.35)
  Top 0.152: JOYSTICK1.3 44.5,26.98 v45.73,26.98 | v33.68,9.6 33.35,9.28 33.35,8.28
  Top 0.254: IC6.1 33.35,8.28 IC6.2
  Bottom 0.152: v33.68,9.6 35.36,9.6 35.99,8.97 43.78,8.97 45.72,10.9 v45.72,26.97 v45.73,26.98
JOYSTICK_X2  (via drill 0.35)
  Top 0.152: v45.11,37.34 45.82,38.05 45.82,40.33 45.16,41 44.5,41 JOYSTICK2.3 | v38.3,9.58 38.45,9.42 38.45,8.28
  Top 0.254: IC6.5 38.45,8.28 IC6.6
  Bottom 0.152: v38.3,9.58 38.52,9.35 43.51,9.35 45.11,10.95 v45.11,37.34
JOYSTICK_Y1  (via drill 0.35)
  Top 0.152: v43.89,31.85 43.89,30.8 JOYSTICK1.6 | v39.85,10.49 39.82,10.47 36.62,10.47 35.95,9.79 35.95,8.28
  Top 0.254: IC6.3 35.95,8.28 IC6.4
  Bottom 0.152: v39.85,10.49 40.12,10.22 42.28,10.22 42.37,10.3 42.37,13.1 42.36,13.11 42.36,27.08 43.1,27.82 43.1,31.07 v43.89,31.85
JOYSTICK_Y2  (via drill 0.35)
  Top 0.152: v46.33,44.81 44.5,44.81 JOYSTICK2.6 | 41,8.28 41,8.25 41,6.98 v40.95,6.93
  Top 0.254: 41,8.28 IC6.7 | 41,8.25 41.03,8.28 IC6.8
  Bottom 0.152: v40.95,6.93 42.18,6.93 46.33,11.09 46.33,27.23 v46.33,44.81
POT1
  Top 0.152: POT_SIG_1.6 17.37,5.67 17.37,8.02 16.25,9.14 15.5,9.14 14.04,10.6 14.04,12.78 17.73,16.46 17.73,17.52 18.91,18.71 22.45,18.71 25.96,15.19 31.33,15.19 32.52,16.39 IC5.1
POT1_SW
  Top 0.152: IC3.17 19.91,9.29 19.91,8.92 19.1,8.11 19.1,5.79 POT_SIG_1.7
POT2  (via drill 0.35)
  Top 0.152: v29.26,11.73 29.26,12.69 31.96,15.38 33.5,15.38 IC5.2 | v16.61,7.92 16.46,7.78 16.27,6.18 POT_SIG_1.5
  Bottom 0.152: v29.26,11.73 26.83,11.73 26.64,11.55 20.23,11.55 v16.61,7.92
POT2_SW
  Top 0.152: POT_SIG_1.8 20.02,8.23 20.51,8.72 IC3.18
POT3  (via drill 0.35)
  Top 0.152: v15.45,7.7 15.43,7.7 15.09,7.35 15.09,5.67 POT_SIG_1.4 | v35.56,17.86 35.47,17.76 IC5.3
  Bottom 0.152: v15.45,7.7 15.83,7.32 16.92,7.32 20.12,10.52 36.88,10.52 39.76,13.39 39.76,18.88 39.01,19.63 37.33,19.63 v35.56,17.86
POT3_SW
  Top 0.152: IC3.19 21.18,9.3 21.18,5.67 POT_SIG_1.9
POT4  (via drill 0.35)
  Top 0.152: v14.38,7.52 13.87,7.01 13.87,5.67 POT_SIG_1.3 | IC5.4 36.88,16.31 36.88,15.43 37.19,15.13 37.19,12.87 35.77,11.46 31.67,11.46 v30.79,12.34
  Bottom 0.152: v30.79,12.34 27.01,12.34 26.51,11.85 18.72,11.85 v14.38,7.52
POT4_SW
  Top 0.152: IC3.20 21.8,9.33 21.8,7.28 22.32,6.75 22.32,5.8 POT_SIG_1.10
POT5
  Top 0.152: IC5.5 38.01,15.55 38.57,14.99 41.72,14.99 42.23,14.47 42.23,13.24 43.28,12.19 44.35,12.19 POT_SIG_2.3
POT5_SW  (via drill 0.35)
  Top 0.152: v23.62,8.95 22.85,8.95 IC3.21 | POT_SIG_2.4 44.35,13.41 43.02,13.41 v42.97,13.36
  Bottom 0.152: v23.62,8.95 32.11,8.95 33.38,10.21 39.24,10.21 39.56,9.88 42.83,9.88 42.97,10.02 v42.97,13.36
POT6
  Top 0.152: IC5.6 39.27,15.68 39.43,15.39 43.28,15.39 44.04,14.63 44.35,14.63 POT_SIG_2.5
POT6_SW
  Top 0.152: POT_SIG_2.6 44.5,15.85 46.78,15.85 47.62,15.01 47.62,10.38 45.11,7.87 45.11,6.41 44.13,5.43 41.95,5.43 39.79,3.27 33.73,3.27 30.35,6.65 27.45,6.65 23.86,10.24 IC3.22
RST  (via drill 0.35)
  Top 0.152: RST.B 10.82,49.68 10.82,49.19 11.09,48.92 15.45,48.92 15.67,49.14 15.67,50.23 14.57,51.34 8.36,51.34 C25.2 7.44,52 v5.79,53.03 | v4.57,54.25 3.43,55.4 R1.2 | 8.93,43.43 10.67,45.17 RST.B' 10.72,45.63 v10.7,46.63 v10.71,46.63 | 8.93,43.43 6.1,43.43 FTDI.6 | 8.93,43.43 19.36,33.01 19.36,24.99 IC4.3
  Bottom 0.152: v4.57,54.25 v5.79,53.03 5.79,51.55 v10.71,46.63
RXD
  Top 0.152: IC4.34 21.95,42.37 21.95,42.82 17.23,47.54 6.4,47.54 6.1,47.24 FTDI.3
SW1  (via drill 0.35)
  Top 0.152: IC3.25 23.91,12.19 27.05,9.05 27.05,7.95 v27.03,7.93 | SWITCHES.2 34.77,5.48 34.77,4.37 v34.77,4.2
  Bottom 0.152: v34.77,4.2 30.75,4.2 v27.03,7.93
SW2
  Top 0.152: SWITCHES.3 36.12,5.49 36.12,3.6 34,3.6 30.48,7.12 29.88,7.12 24.15,12.85 23.37,12.85 IC3.26
SW3
  Top 0.152: SWITCHES.4 37.34,5.64 37.34,6.17 36.8,6.71 32.25,6.71 25.5,13.46 23.39,13.46 IC3.27
SW4
  Top 0.152: SWITCHES.5 38.56,5.64 38.56,6.1 37.64,7.01 32.38,7.01 25.27,14.12 23.38,14.12 IC3.28
SW5
  Top 0.152: SWITCHES.6 40.83,5.6 42.65,7.42 42.65,8.97 40.5,11.12 39.4,11.12 39.12,10.85 28.97,10.85 25.23,14.59 22.91,14.59 IC3.1
TXD  (via drill 0.35)
  Top 0.152: v18.14,45.26 20.73,42.67 20.73,42.37 IC4.35 | v7.32,45.61 6.66,45.61 6.4,45.87 6.1,45.87 FTDI.4
  Bottom 0.152: v18.14,45.26 17.79,45.61 v7.32,45.61
VIN  (via drill 0.35)
  Top 0.152: J1.1 11.01,63.77 v12.4,63.77 | v6.6,61.38 6.09,61.89 U2.1 4.54,62.24 4.12,62.66 3.05,62.66 2.65,62.26 U2.3 | U1.3 9.43,61.24 9.43,61.41 9.84,61.83 10.95,61.83 11.33,61.45 U1.1 13.14,60.91 v13.15,60.9
  Bottom 0.152: v6.6,61.38 5.54,62.44 C1.1 C21.1 2.6,62.48 2.6,63.27 3.1,63.77 v12.4,63.77 11.43,62.8 9.68,62.8 9.3,62.42 C23.1 C3.1 11.43,60.9 v13.15,60.9

## Text on the board
tPlace: Designed by Marian Uta / PCB by Alex Heisler / v4.4